# EAGLE board 2-to-4-decoder (EAGLE 9.7.0)

Size 160.87 x 56.6 mm. Coordinates in mm from the lower left corner, seen from the top.
Outline: 0,0 160.87,0 160.87,56.6 0,56.6 0,0
Copper layers (1*16): Top 0.035mm / dielectric 1.5mm / Bottom 0.035mm
Design rules "default": minimum track width 6mil, minimum drill 0.35mm, track to track 6mil, track to pad 6mil, pad to pad 6mil, via to via 6mil, smd to smd 6mil, copper to edge 40mil, drill to drill 6mil, minimum pad ring 10mil, minimum via ring 8mil, stop-mask expansion 4mil, vias tented up to drill 0mil, thermal gap 10mil

## Footprints (pad centres in the part's own frame; a part is rotated, then mirrored left to right if it is on the bottom)
LEDRD254W60D565H860B = drill 0.981 pad 1.581: 1 -1.27,0; 2 1.27,0
BATTERY-GENERIC = drill 1.118 pad 3.15 octagon: + 2.54,0; - -2.54,0
RESAD1016W63L850D250B = drill 0.83 pad 1.43: 1 -5.08,0; 2 5.08,0
78B04ST = drill 0.8: 1 -3.81,-3.81; 2 -1.27,-3.81; 3 1.27,-3.81; 4 3.81,-3.81; 5 3.81,3.81; 6 1.27,3.81; 7 -1.27,3.81; 8 -3.81,3.81
DIP762W53P254L1969H508Q14B = drill 0.743 pad 1.343: 1 -3.81,7.62; 2 -3.81,5.08; 3 -3.81,2.54; 4 -3.81,0; 5 -3.81,-2.54; 6 -3.81,-5.08; 7 -3.81,-7.62; 8 3.81,-7.62; 9 3.81,-5.08; 10 3.81,-2.54; 11 3.81,0; 12 3.81,2.54; 13 3.81,5.08; 14 3.81,7.62

## Placement (x,y rotation side)
D1  RED  [LEDRD254W60D565H860B]  100.71,24.21 180 top
D2  RED  [LEDRD254W60D565H860B]  110.87,24.21 180 top
D3  RED  [LEDRD254W60D565H860B]  121.03,24.21 180 top
D4  RED  [LEDRD254W60D565H860B]  128.65,24.21 180 top
P1  BATTERYGENERIC  [BATTERY-GENERIC]  152.61,48.34 180 top
R1  1k  [RESAD1016W63L850D250B]  99.44,8.97 90 top
R2  1k  [RESAD1016W63L850D250B]  109.6,8.97 90 top
R3  1k  [RESAD1016W63L850D250B]  119.76,8.97 90 top
R4  1k  [RESAD1016W63L850D250B]  127.38,8.97 90 top
SW1  SPST-478B04ST  [78B04ST]  9.27,28.02 0 top
U1  74HC04_PDIP  [DIP762W53P254L1969H508Q14B]  33.4,10.24 90 top
U2  74HC08_PDIP  [DIP762W53P254L1969H508Q14B]  63.88,10.24 90 top

## Library data of the parts
D1-D4 = Tinkercad; CATEGORY: Opto-Electronic; SUB-CATEGORY: LED; VALUE: LED_RED
P1 R1-R4 SW1 U1 U2 = Tinkercad

## Nets
D1_C: D1.2 R1.2
D2_C: D2.2 R2.2
D3_C: D3.2 R3.2
D4_C: D4.2 R4.2
P1+: P1.+ SW1.5 SW1.6 SW1.7 SW1.8 U1.14 U2.14
P1-: P1.- R1.1 R2.1 R3.1 R4.1 U1.7 U2.7
U1_5A: SW1.2 U1.11 U2.1 U2.9
U1_5Y: U1.10 U2.5 U2.12
U1_6A: SW1.1 U1.13 U2.4 U2.10
U1_6Y: U1.12 U2.2 U2.13
U2_1Y: D2.1 U2.3
U2_2Y: D3.1 U2.6
U2_3Y: D4.1 U2.8
U2_4Y: D1.1 U2.11

## Tracks (layer width: path | path; a pad name or v marks a point on that pad's centre or on a via)
D1_C  (1 unrouted)
D2_C  (1 unrouted)
D3_C  (1 unrouted)
D4_C  (1 unrouted)
P1+  (6 unrouted)
P1-  (6 unrouted)
U1_5A  (3 unrouted)
U1_5Y  (2 unrouted)
U1_6A  (3 unrouted)
U1_6Y  (2 unrouted)
U2_1Y  (1 unrouted)
U2_2Y  (1 unrouted)
U2_3Y  (1 unrouted)
U2_4Y  (1 unrouted)